# Altium PCB Shels_System_ADP.PcbDoc
Units mm, origin at the board's own origin, x right, y up, seen from the top; angles counter-clockwise.
Board outline 62.43 x 54.81 mm, 2 copper layers (Top Layer, Bottom Layer); 17 components, 21 nets, 88 pads, 13 vias.
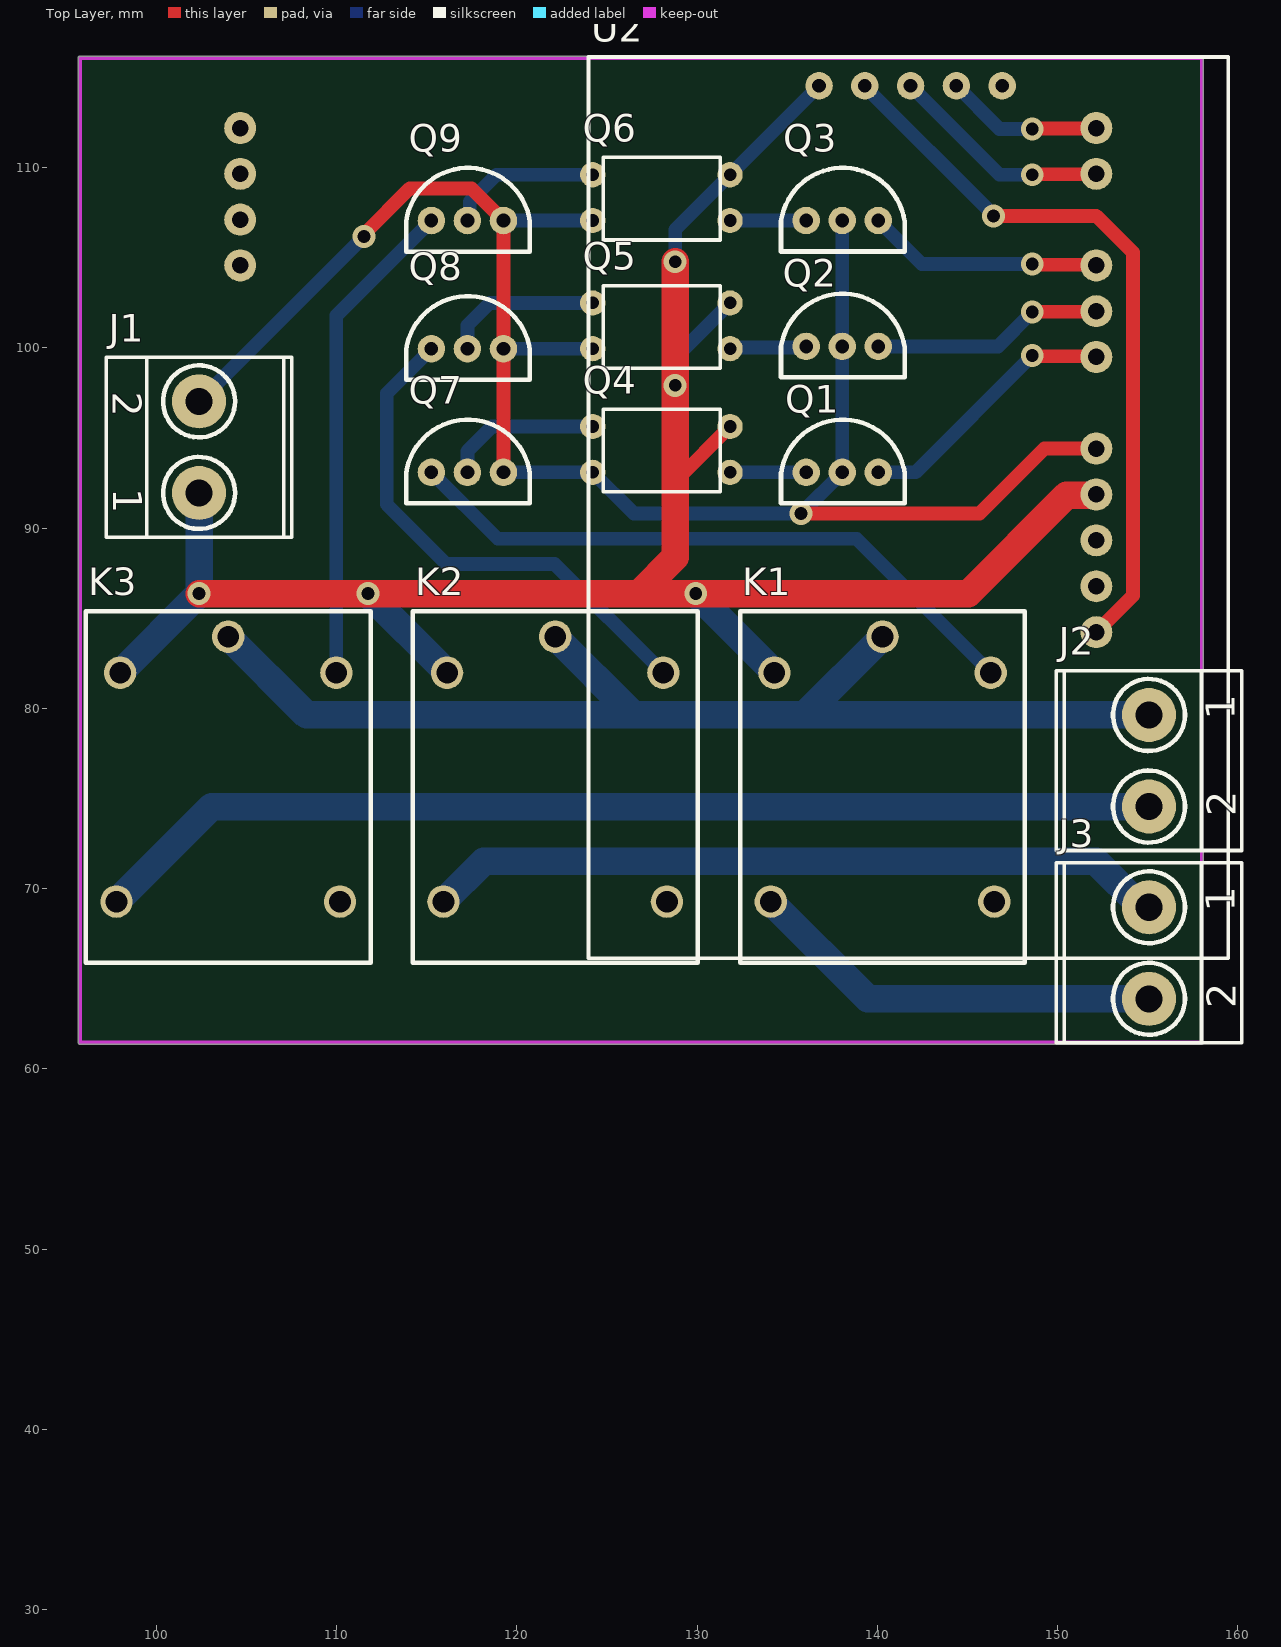
[diagram p0: Top Layer view]
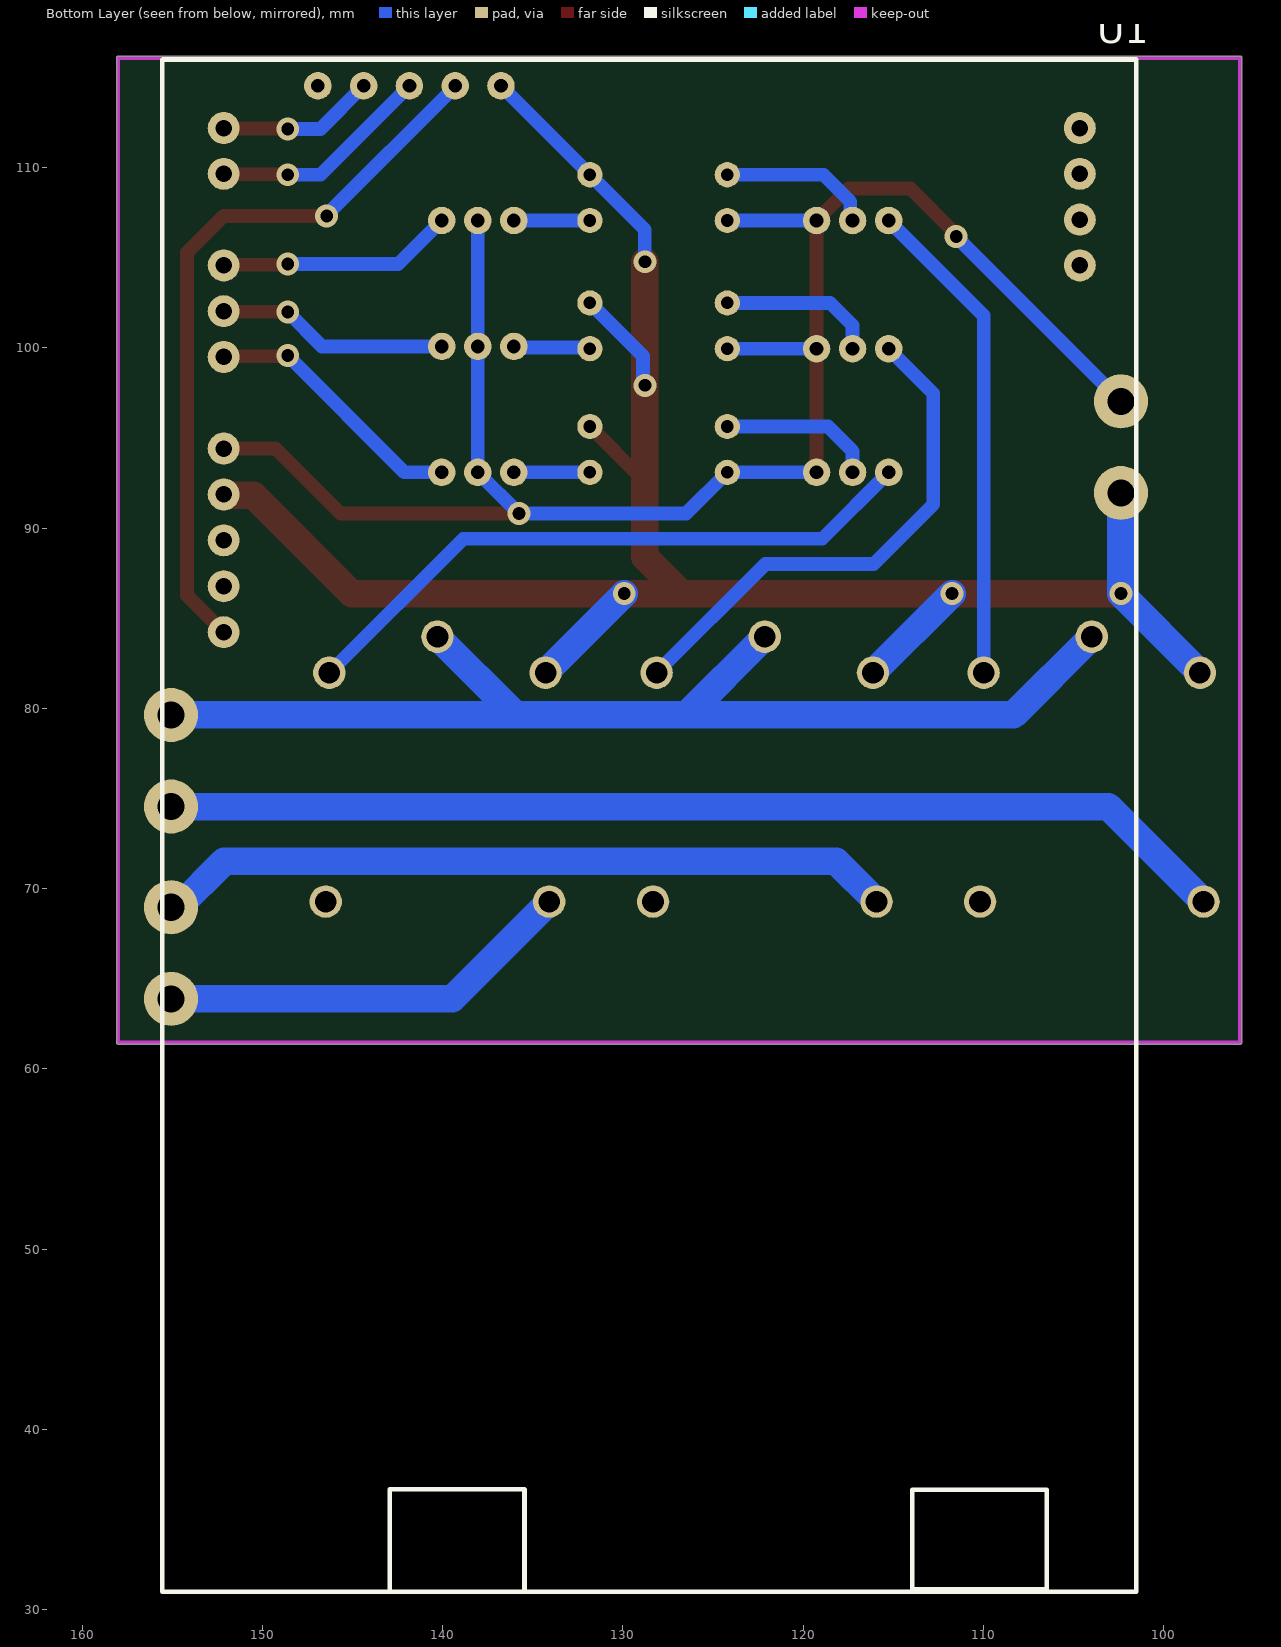
[diagram p1: Bottom Layer view, seen from below]

## Layer stack, top to bottom
Top Solder: solder mask 0.0102, Solder Resist, Dk 3.5
Top Layer: signal copper 0.0356
Dielectric 1: dielectric 0.32, FR-4, Dk 4.8
Bottom Layer: signal copper 0.0356
Bottom Solder: solder mask 0.0102, Solder Resist, Dk 3.5

## Board outline
95.658,61.468 95.658,116.078 cw(c95.758,116.078) 95.758,116.178 157.988,116.178 cw(c157.988,116.078) 158.088,116.078 158.088,61.468 cw(c157.988,61.468) 157.988,61.368 95.758,61.368 cw(c95.758,61.468)

## Design rules (kind name [scope] priority, off if disabled: settings)
Clearance [All] p1: gap=0.254 ignorepadtopadclearanceinfootprint=FALSE except(0: Arc-Hole Track-Hole SMDPad-Hole THPad-Hole Via-Hole Fill-Hole Poly-Hole Region-Hole Text-Hole)
ComponentClearance [All] p1 off: gap=0.254 collisioncheckmode=3 verticalgap=0.254 showdistances=FALSE
PolygonConnect [All] p1: connectstyle=Relief reliefconductorwidth=0.254 reliefentries=4 polygonreliefangle="90 Angle" airgapwidth=0.254
RoutingVias [All] p1: holewidth=0.711 width=1.27 viastyle="Through Hole" minholewidth=0.711 minwidth=1.27 maxholewidth=0.711 maxwidth=1.27
SolderMaskExpansion [All] p1: expansion=0.102 istentingtop=FALSE
Width [All] p1: maxlimit=1.524 minlimit=0.762 preferedwidth=0.762 minimp=50.000000 maximp=50.000000 favimp=50.000000
29 further rules are at their usual default settings.

## Components (designator, comment, footprint, x,y, rotation, side; value= is the part's Value field where it differs from the comment)
J1 "Terminal_Block" "terminal block" 102.362,97.028 r180 top
J2 "Terminal_Block" "terminal block" 155.067,74.549 r0 top
J3 "Terminal_Block" "terminal block" 155.067,63.881 r0 top
K1 "Relay" Relay 140.589,75.184 r270 top
K2 "Relay" Relay 122.428,75.184 r270 top
K3 "Relay" Relay 104.287,75.184 r270 top
Q1 "C1815" C1815 138.052,93.089 r270 top
Q2 "C1815" C1815 138.049,100.076 r270 top
Q3 "C1815" C1815 138.049,107.061 r270 top
Q4 "PC817" PC817 131.826,95.631 r180 top
Q5 "PC817" PC817 131.826,102.489 r180 top
Q6 "PC817" PC817 131.826,109.601 r180 top
Q7 "S9013" S9013 117.256,93.089 r270 top
Q8 "S9013" S9013 117.256,99.947 r270 top
Q9 "S9013" S9013 117.256,107.059 r270 top
U1 "ADP_Corvette_T1" Corvette_T1 131.137,79.546 r90 bottom
U2 "ESP12_F_Module" ESP12_F_Holtek 159.47,116.135 r180 top

## Footprints (in the part's own frame and the unit in brackets; to place one, negate y for a bottom-side part, rotate by r counter-clockwise, add the part's x,y. Pads: shape width x height; smd on the part's side, far side on the other; paste and mask are expansions set on the pad)
C1815 [mil] "C1815_TO-92"
  round 60 hole 30: 0(-0.08,-78.87) 1(-0.08,-0.13) 2(-0.08,78.61)
  silkscreen extent -115,-134 68,136
Corvette_T1 [mil]
  rect 70x70 on Mech1: 1(-116.72,827.14)
  round 70 on Mech1: 2(-16.44,827.14) 3(83.84,827.14) 12(1085.24,827.14) 19(885.24,-1042.94) 20(785.24,-1042.94) 21(685.24,-1042.94) 22(585.24,-1042.94) 23(427.76,-1042.94) 24(327.94,-1042.94) 25(228.11,-1042.94) 26(128.29,-1042.94) 27(28.46,-1042.94) 28(-71.36,-1042.94) 29(-171.19,-1042.94) 30(-271.01,-1042.94) 31(-370.84,-1042.94) 32(-470.66,-1042.94)
  round 70 hole 35.98: 4(184.12,827.14) 5(284.4,827.14) 6(384.68,827.14) 7(484.96,827.14) 8(585.24,827.14) 9(785.24,827.14) 10(885.24,827.14) 11(985.24,827.14) 13(1185.24,827.14) 14(1285.24,827.14) 15(1285.24,-1042.94) 16(1185.24,-1042.94) 17(1085.24,-1042.94) 18(985.24,-1042.94)
  silkscreen extent -1912,-1166 1435,961
ESP12_F_Holtek [mil] "Holtek_Wi-Fi_module"
  round 60 hole 30: 1(494.09,62.99) 2(594.09,62.99) 3(694.09,62.99) 4(794.09,62.99) 5(894.09,62.99)
  silkscreen extent 0,0 1398,1969
PC817 [mm] "光電耦合器"
  round 1.4 hole 0.7: 1(0,2.54) 2(0,0) 3(7.62,0) 4(7.62,2.54)
  silkscreen extent 0.55,-0.96 7.05,3.62
Relay [mm] "SRD05VDCSLC"
  round 1.8 hole 1.2: 0(-6.788,5.695) 1(-8.788,-0.305) 2(-6.788,-6.305) 3(5.912,5.895) 4(5.912,-6.505)
  silkscreen extent -10.19,-8.2 9.31,7.6
S9013 [mil] "S9013_TO-92"
  round 60 hole 30: 0(-0.08,-78.87) 1(-0.08,-0.13) 2(-0.08,78.61)
  silkscreen extent -115,-134 68,136
"terminal block" [mm]
  round 3 hole 1.5 paste+0 mask+0.051: 1(0,5.08) 2(0,0)
  silkscreen extent -5.15,-2.44 5.15,7.54

## Part data
J1 J2 J3: library part "Terminal Block"
U1: library part Corvette_T1
U2: library part ESP12_F_Holtek

## Via types
v1: diameter 1.27, hole 0.711, Top Layer to Bottom Layer, 13 vias

## Nets (pads, with @x,y where several pads share a name; then routed paths per layer and width w, separated by ;. In a path a pad name is that pad's centre, name@x,y a point inside that pad or via, vN(x,y) a via of type N, cw(c..) or ccw(c..) an arc to the next point about the centre after c; other vN are vias at no path point)
3.3V: U1.4 U2.4 | length 40.7
  Top Layer w0.762: v1(146.431,107.315) 152.146,107.315 154.178,105.283 154.178,86.254 U1.4
  Bottom Layer w0.762: U2.4 139.3,114.49 146.431,107.36 v1(146.431,107.315) ; U1.4@152.135,84.222 U1.4
5V: J1.2 Q1.1 Q2.1 Q3.1 Q4.4 Q5.4 Q6.4 Q7.2 Q8.2 Q9.2 U1.8 | length 99
  Top Layer w0.762: v1(111.506,106.172) 111.506,106.299 114.046,108.839 117.475,108.839 Q9.2 Q8.2 Q7.2 ; v1(135.763,90.805) 145.669,90.805 149.275,94.411 U1.8
  Bottom Layer w0.762: J1.2 v1(111.506,106.172) ; Q7.2 Q4.4 126.492,90.805 v1(135.763,90.805) Q1.1 138.047,93.093 138.047,100.076 Q2.1 Q3.1 ; Q8.2 Q5.4 ; Q9.2 Q6.4
24V: J2.1 K1.1 K2.1 K3.1 | length 65.2
  Bottom Layer w1.524: K3.1 108.325,79.629 126.467,79.629 ; K2.1 126.467,79.629 ; K1.1 135.941,79.629 ; J2.1 135.941,79.629 ; 126.467,79.629 135.941,79.629
C1815_GreenLED: Q3.2 U1.11 | length 13.1
  Top Layer w0.762: v1(148.59,104.648) 148.629,104.609 152.108,104.609 U1.11
  Bottom Layer w0.762: Q3.2 142.461,104.648 v1(148.59,104.648)
C1815_RedLED: Q1.2 U1.9 | length 14.8
  Top Layer w0.762: v1(148.59,99.568) 148.629,99.529 152.108,99.529 U1.9
  Bottom Layer w0.762: Q1.2 142.113,93.091 v1(148.59,99.568)
C1815_YellowLED: Q2.2 U1.10 | length 12.9
  Top Layer w0.762: v1(148.59,101.981) 148.615,102.006 152.121,102.006 U1.10
  Bottom Layer w0.762: Q2.2 146.687,100.078 v1(148.59,101.981)
GND: J1.1 K1.2 K2.2 K3.2 Q4.2 Q5.2 Q6.2 U1.7 U2.5 | length 118.7
  Top Layer w0.762: 128.778,92.71 128.905,92.71 Q4.2
  Top Layer w1.524: v1(102.362,86.36) v1(111.736,86.36) 126.746,86.36 ; v1(128.778,104.775) v1(128.778,97.917) 128.778,92.71 128.778,88.392 126.746,86.36 ; U1.7 152.097,91.815 150.489,91.815 145.034,86.36 v1(129.921,86.36) 126.746,86.36
  Bottom Layer w0.762: v1(128.778,97.917) 128.875,98.014 128.875,99.538 Q5.2 ; v1(128.778,104.775) 128.778,106.553 Q6.2 U2.5
  Bottom Layer w1.524: K3.2 102.362,86.352 v1(102.362,86.36) J1.1 ; v1(111.736,86.36) K2.2 ; v1(129.921,86.36) 134.284,81.997 K1.2
GreenLED: J2.2 K3.4 | length 59.5
  Bottom Layer w1.524: K3.4 103.059,74.549 J2.2
PC817_GreenLED: Q3.0 Q6.1 | length 4.2
  Bottom Layer w0.762: Q6.1 Q6.1 136.045,107.062 Q3.0
PC817_RedLED: Q1.0 Q4.1 | length 4.2
  Bottom Layer w0.762: Q4.1 Q1.0
PC817_YellowLED: Q2.0 Q5.1 | length 4.3
  Bottom Layer w0.762: Q5.1 131.89,100.013 135.981,100.013 Q2.0
RedLED: J3.2 K1.4 | length 23.2
  Bottom Layer w1.524: K1.4 139.476,63.881 J3.2
Relay_GreenLED: K3.0 Q9.0 | length 27.3
  Bottom Layer w0.762: K3.0 109.982,101.79 Q9.0
Relay_RedLED: K1.0 Q7.0 | length 35.6
  Bottom Layer w0.762: Q7.0 118.936,89.408 138.849,89.408 K1.0
Relay_YellowLED: K2.0 Q8.0 | length 28.9
  Bottom Layer w0.762: Q8.0 112.776,97.472 112.776,91.313 116.078,88.011 122.085,88.011 K2.0
S9013_GreenLED: Q6.3 Q9.1 | length 8.5
  Bottom Layer w0.762: Q9.1 117.378,107.186 117.378,108.107 118.872,109.601 Q6.3
S9013_RedLED: Q4.3 Q7.1 | length 8.7
  Bottom Layer w0.762: Q7.1 117.253,94.266 118.618,95.631 Q4.3
S9013_YellowLED: Q5.3 Q8.1 | length 8.8
  Bottom Layer w0.762: Q8.1 117.253,101.251 118.491,102.489 Q5.3
Usart1_Rx_PA4: U1.13 U2.3 | length 12.4
  Top Layer w0.762: v1(148.59,109.601) 148.615,109.626 152.121,109.626 U1.13
  Bottom Layer w0.762: U2.3 146.774,109.601 v1(148.59,109.601)
Usart1_Tx_PA5: U1.14 U2.2 | length 8.8
  Top Layer w0.762: v1(148.59,112.141) 148.615,112.166 152.121,112.166 U1.14
  Bottom Layer w0.762: U2.2 146.774,112.141 v1(148.59,112.141)
YellowLED: J3.1 K2.4 | length 41.1
  Bottom Layer w1.524: K2.4 118.152,71.501 152.128,71.501 154.668,68.961 J3.1
pads on no net: K1.3 K2.3 K3.3 U1.1 U1.2 U1.3 U1.5 U1.6 U1.12 U1.15 U1.16 U1.17 U1.18 U1.19 U1.20 U1.21 U1.22 U1.23 U1.24 U1.25 U1.26 U1.27 U1.28 U1.29 U1.30 U1.31 U1.32 U2.1

## Keep-outs
Keep-Out Layer:
  lines w0.2: 95.758,61.468 157.988,61.468 157.988,116.078 95.758,116.078 95.758,61.468

## Text inside footprints (layer, text, board x,y; h text height)
J1: Top Overlay "2" at 97.561,97.561 h1.6 r270; Top Overlay "1" at 97.612,92.202 h1.6 r270
J2: Top Overlay "2" at 159.868,74.016 h1.6 r90; Top Overlay "1" at 159.817,79.375 h1.6 r90
J3: Top Overlay "2" at 159.868,63.348 h1.6 r90; Top Overlay "1" at 159.817,68.707 h1.6 r90